# Altium PCB fpga.PcbDoc (part 5 of 6)
Units mm, origin at the board's own origin, x right, y up, seen from the top; angles counter-clockwise.
Board outline 111.63 x 111 mm, 2 copper layers (Top Layer, Bottom Layer); 5 components, 0 nets, 896 pads, 0 vias.
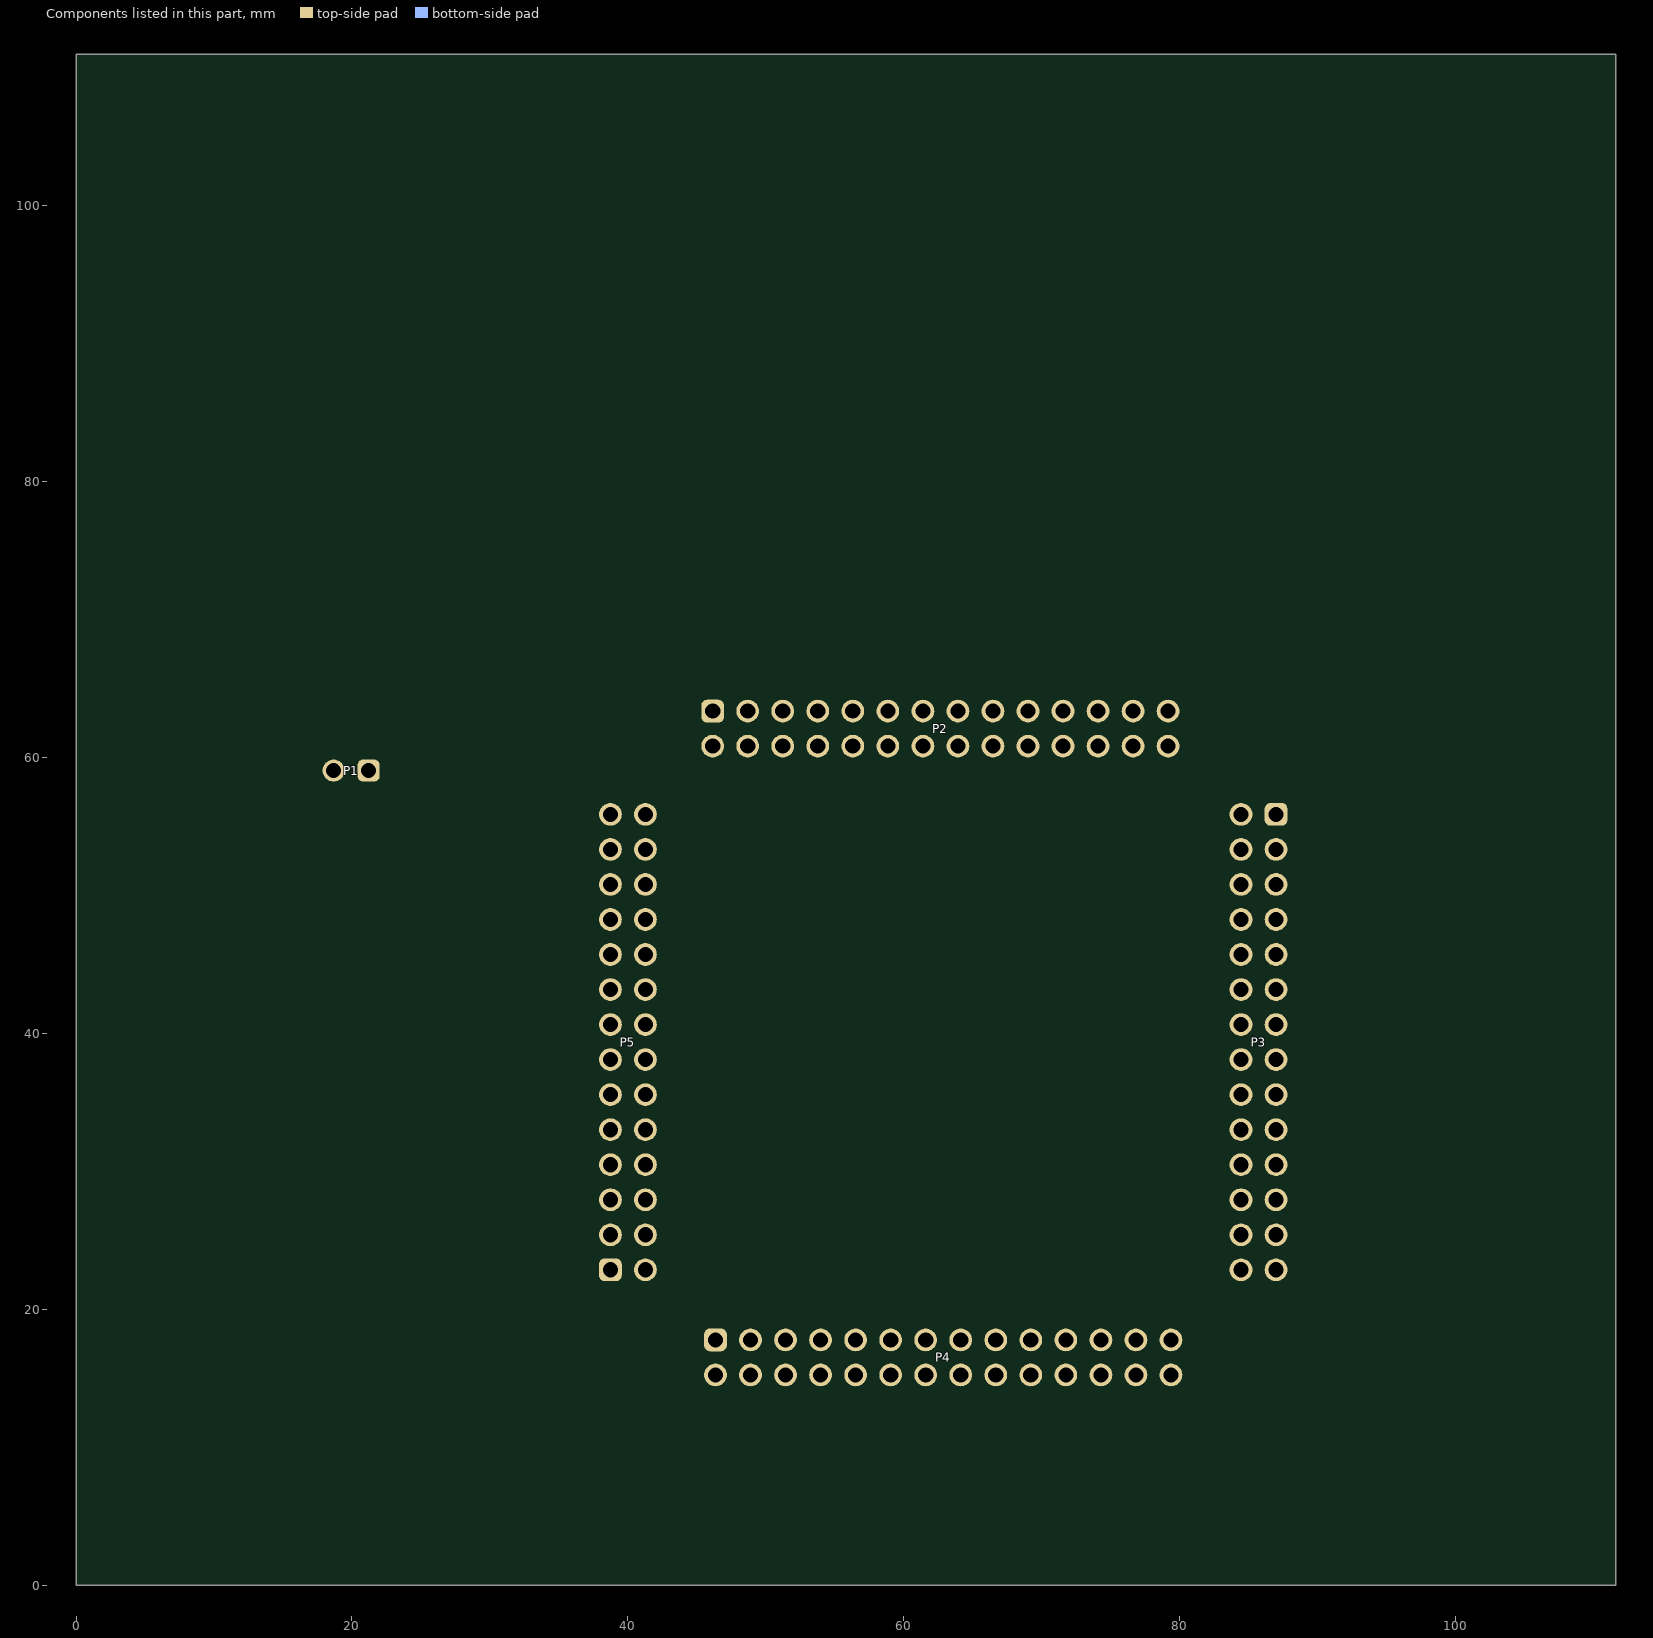
[diagram p5: the components of this part, seen from the top]

## Nets (pads, with @x,y where several pads share a name; then routed paths per layer and width w, separated by ;. In a path a pad name is that pad's centre, name@x,y a point inside that pad or via, vN(x,y) a via of type N, cw(c..) or ccw(c..) an arc to the next point about the centre after c; other vN are vias at no path point) (continued)
copper on no net: (continued)
  Top Layer w0.027: 14.522,21.97 14.672,21.97 ; 14.522,21.97 14.522,21.995 ; 14.522,21.995 14.647,21.995 ; 14.522,21.995 14.547,22.02 ; 14.522,22.045 14.647,22.045 ; 14.522,22.045 14.522,22.07 ; 14.522,22.045 14.547,22.02 ; 14.522,22.07 14.672,22.07 ; 14.522,22.07 14.547,22.095 14.522,22.12 ; 14.522,22.12 14.672,22.12 ; 14.522,22.12 14.522,22.145 ; 14.522,22.145 14.647,22.145 ; 14.522,22.145 14.547,22.17 ; 14.522,22.195 14.647,22.195 ; 14.522,22.195 14.522,22.22 ; 14.522,22.195 14.547,22.17 ; 14.522,22.22 14.672,22.22 ; 14.522,22.22 14.547,22.245 14.522,22.27 ; 14.522,22.27 14.672,22.27 ; 14.522,22.27 14.522,22.295 ; 14.522,22.295 14.647,22.295 ; 14.522,22.295 14.547,22.32 ; 14.522,22.345 14.647,22.345 ; 14.522,22.345 14.522,22.37 ; 14.522,22.345 14.547,22.32 ; 14.522,22.37 14.672,22.37 ; 14.522,22.37 14.547,22.395 14.522,22.42 ; 14.522,22.42 14.672,22.42 ; 14.522,22.42 14.522,22.445 ; 14.522,22.445 14.647,22.445 ; 14.522,22.445 14.547,22.47 ; 14.522,22.495 14.647,22.495 ; 14.522,22.495 14.522,22.52 ; 14.522,22.495 14.547,22.47 ; 14.522,22.52 14.672,22.52 ; 14.522,22.52 14.547,22.545 14.522,22.57 ; 14.522,22.57 14.672,22.57 ; 14.522,22.57 14.522,22.595 ; 14.522,22.595 14.647,22.595 ; 14.522,22.595 14.547,22.62 ; 14.522,22.645 14.647,22.645 ; 14.522,22.645 14.522,22.67 ; 14.522,22.645 14.547,22.62 ; 14.522,22.67 14.672,22.67 ; 14.522,22.67 14.547,22.695 14.522,22.72 ; 14.522,22.72 14.672,22.72 ; 14.522,22.72 14.522,22.745 ; 14.522,22.745 14.647,22.745 ; 14.522,22.745 14.547,22.77 ; 14.522,22.795 14.647,22.795 ; 14.522,22.795 14.522,22.82 ; 14.522,22.795 14.547,22.77 ; 14.522,22.82 14.672,22.82 ; 14.522,22.82 14.547,22.845 14.522,22.87 ; 14.522,22.87 14.672,22.87 ; 14.522,22.87 14.522,22.895 ; 14.522,22.895 14.647,22.895 ; 14.522,22.895 14.547,22.92 ; 14.522,22.945 14.647,22.945 ; 14.522,22.945 14.522,22.97 ; 14.522,22.945 14.547,22.92 ; 14.522,22.97 14.672,22.97 ; 14.522,22.97 14.547,22.995 14.522,23.02 ; 14.522,23.02 14.672,23.02 ; 14.522,23.02 14.522,23.045 ; 14.522,23.045 14.647,23.045 ; 14.522,23.045 14.547,23.07 ; 14.522,23.095 14.647,23.095 ; 14.522,23.095 14.522,23.12 ; 14.522,23.095 14.547,23.07 ; 14.522,23.12 14.672,23.12 ; 14.522,23.12 14.547,23.145 14.522,23.17 ; 14.522,23.17 14.672,23.17 ; 14.522,23.17 14.522,23.195 ; 14.522,23.195 14.647,23.195 ; 14.522,23.195 14.547,23.22 ; 14.522,23.245 14.647,23.245 ; 14.522,23.245 14.522,23.27 ; 14.522,23.245 14.547,23.22 ; 14.522,23.27 14.672,23.27 ; 14.522,23.27 14.547,23.295 14.522,23.32 ; 14.522,23.32 14.672,23.32 ; 14.522,23.32 14.522,23.345 ; 14.522,23.345 14.647,23.345 ; 14.522,23.345 14.547,23.37 ; 14.522,23.395 14.647,23.395 ; 14.522,23.395 14.522,23.42 ; 14.522,23.395 14.547,23.37 ; 14.522,23.42 14.672,23.42 ; 14.522,23.42 14.547,23.445 14.522,23.47 ; 14.522,23.47 14.672,23.47 ; 14.522,23.47 14.522,23.495 ; 14.522,23.495 14.647,23.495 ; 14.522,23.495 14.547,23.52 ; 14.522,23.545 14.647,23.545 ; 14.522,23.545 14.522,23.57 ; 14.522,23.545 14.547,23.52 ; 14.522,23.57 14.672,23.57 ; 14.522,23.57 14.547,23.595 14.522,23.62 ; 14.522,23.62 14.672,23.62 ; 14.522,23.62 14.522,23.645 ; 14.522,23.645 14.647,23.645 ; 14.522,23.645 14.547,23.67 ; 14.522,23.695 14.647,23.695 ; 14.522,23.695 14.522,23.72 ; 14.522,23.695 14.547,23.67 ; 14.522,23.72 14.672,23.72 ; 14.522,23.72 14.547,23.745 14.522,23.77 ; 14.522,23.77 14.672,23.77 ; 14.522,23.77 14.522,23.795 ; 14.522,23.795 14.647,23.795 ; 14.522,23.795 14.547,23.82 ; 14.522,23.845 14.647,23.845 ; 14.522,23.845 14.522,23.87 ; 14.522,23.845 14.547,23.82 ; 14.522,23.87 14.672,23.87 ; 14.522,23.87 14.547,23.895 14.522,23.92 ; 14.522,23.92 14.672,23.92 ; 14.522,23.92 14.522,23.945 ; 14.522,23.945 14.647,23.945 ; 14.522,23.945 14.547,23.97 ; 14.522,23.995 14.647,23.995 ; 14.522,23.995 14.522,24.02 ; 14.522,23.995 14.547,23.97 ; 14.522,24.02 14.672,24.02 ; 14.522,24.02 14.547,24.045 14.522,24.07 ; 14.522,24.07 14.672,24.07 ; 14.522,24.07 14.522,24.095 ; 14.522,24.095 14.647,24.095 ; 14.522,24.095 14.547,24.12 ; 14.522,24.145 14.647,24.145 ; 14.522,24.145 14.522,24.17 ; 14.522,24.145 14.547,24.12 ; 14.522,24.17 14.672,24.17 ; 14.522,24.17 14.547,24.195 14.522,24.22 ; 14.522,24.22 14.672,24.22 ; 14.522,24.22 14.522,24.245 ; 14.522,24.245 14.647,24.245 ; 14.522,24.245 14.547,24.27 ; 14.522,24.295 14.647,24.295 ; 14.522,24.295 14.522,24.32 ; 14.522,24.295 14.547,24.27 ; 14.522,24.32 14.672,24.32 ; 14.522,24.32 14.547,24.345 14.522,24.37 ; 14.522,24.37 14.672,24.37 ; 14.522,24.37 14.522,24.395 ; 14.522,24.395 14.647,24.395 ; 14.522,24.395 14.547,24.42 ; 14.522,24.445 14.647,24.445 ; 14.522,24.445 14.522,24.47 ; 14.522,24.445 14.547,24.42 ; 14.522,24.47 14.672,24.47 ; 14.522,24.47 14.547,24.495 14.522,24.52 ; 14.522,24.52 14.672,24.52 ; 14.522,24.52 14.522,24.545 ; 14.522,24.545 14.647,24.545 ; 14.522,24.545 14.547,24.57 ; 14.522,24.595 14.647,24.595 ; 14.522,24.595 14.522,24.62 ; 14.522,24.595 14.547,24.57 ; 14.522,24.62 14.672,24.62 ; 14.522,24.62 14.547,24.645 14.522,24.67 ; 14.522,24.67 14.672,24.67 ; 14.522,24.67 14.522,24.695 ; 14.522,24.695 14.647,24.695 ; 14.522,24.695 14.547,24.72 ; 14.522,24.745 14.647,24.745 ; 14.522,24.745 14.522,24.77 ; 14.522,24.745 14.547,24.72 ; 14.522,24.77 14.672,24.77 ; 14.522,24.77 14.547,24.795 14.522,24.82 ; 14.522,24.82 14.672,24.82 ; 14.522,24.82 14.522,24.845 ; 14.522,24.845 14.647,24.845 ; 14.522,24.845 14.547,24.87 ; 14.522,24.895 14.647,24.895 ; 14.522,24.895 14.522,24.92 ; 14.522,24.895 14.547,24.87 ; 14.522,24.92 14.672,24.92 ; 14.522,24.92 14.547,24.945 14.522,24.97 ; 14.522,24.97 14.672,24.97 ; 14.522,24.97 14.522,24.995 ; 14.522,24.995 14.647,24.995 ; 14.522,24.995 14.547,25.02 ; 14.522,25.045 14.647,25.045 ; 14.522,25.045 14.522,25.07 ; 14.522,25.045 14.547,25.02 ; 14.522,25.07 14.672,25.07 ; 14.522,25.07 14.547,25.095 14.522,25.12 ; 14.522,25.12 14.672,25.12 ; 14.522,25.12 14.522,25.145 ; 14.522,25.145 14.647,25.145 ; 14.522,25.145 14.547,25.17 ; 14.522,25.195 14.647,25.195 ; 14.522,25.195 14.522,25.22 ; 14.522,25.195 14.547,25.17 ; 14.522,25.22 14.672,25.22 ; 14.522,25.22 14.547,25.245 14.522,25.27 ; 14.522,25.27 14.672,25.27 ; 14.522,25.27 14.522,25.295 ; 14.522,25.295 14.647,25.295 ; 14.522,25.295 14.547,25.32 ; 14.522,25.345 14.647,25.345 ; 14.522,25.345 14.522,25.37 ; 14.522,25.345 14.547,25.32 ; 14.522,25.37 14.672,25.37 ; 14.522,25.37 14.547,25.395 14.522,25.42 ; 14.522,25.42 14.672,25.42 ; 14.522,25.42 14.522,25.445 ; 14.522,25.445 14.647,25.445 ; 14.522,25.445 14.547,25.47 ; 14.522,25.495 14.647,25.495 ; 14.522,25.495 14.522,25.52 ; 14.522,25.495 14.547,25.47 ; 14.522,25.52 14.672,25.52 ; 14.522,25.52 14.547,25.545 14.522,25.57 ; 14.522,25.57 14.672,25.57 ; 14.522,25.57 14.522,25.595 ; 14.522,25.595 14.647,25.595 ; 14.522,25.595 14.547,25.62 ; 14.522,25.645 14.647,25.645 ; 14.522,25.645 14.522,25.67 ; 14.522,25.645 14.547,25.62 ; 14.522,25.67 14.672,25.67 ; 14.522,25.67 14.547,25.695 14.522,25.72 ; 14.522,25.72 14.672,25.72 ; 14.522,25.72 14.522,25.745 ; 14.522,25.745 14.647,25.745 ; 14.522,25.745 14.547,25.77 ; 14.522,25.795 14.647,25.795 ; 14.522,25.795 14.522,25.82 ; 14.522,25.795 14.547,25.77 ; 14.522,25.82 14.672,25.82 ; 14.522,25.82 14.547,25.845 14.522,25.87 ; 14.522,25.87 14.672,25.87 ; 14.522,25.87 14.522,25.895 ; 14.522,25.895 14.647,25.895 ; 14.522,25.895 14.547,25.92 ; 14.522,25.945 14.647,25.945 ; 14.522,25.945 14.522,25.97 ; 14.522,25.945 14.547,25.92 ; 14.522,25.97 14.672,25.97 ; 14.522,25.97 14.547,25.995 14.522,26.02 ; 14.522,26.02 14.672,26.02 ; 14.522,26.02 14.522,26.045 ; 14.522,26.045 14.647,26.045 ; 14.522,26.045 14.547,26.07 ; 14.522,26.095 14.647,26.095 ; 14.522,26.095 14.522,26.12 ; 14.522,26.095 14.547,26.07 ; 14.522,26.12 14.672,26.12 ; 14.522,26.12 14.547,26.145 14.522,26.17 ; 14.522,26.17 14.672,26.17 ; 14.522,26.17 14.522,26.195 ; 14.522,26.195 14.647,26.195 ; 14.522,26.195 14.547,26.22 ; 14.522,26.245 14.647,26.245 ; 14.522,26.245 14.522,26.27 ; 14.522,26.245 14.547,26.22 ; 14.522,26.27 14.672,26.27 ; 14.522,26.27 14.547,26.295 14.522,26.32 ; 14.522,26.32 14.672,26.32 ; 14.522,26.32 14.522,26.345 ; 14.522,26.345 14.647,26.345 ; 14.522,26.345 14.547,26.37 ; 14.522,26.395 14.647,26.395 ; 14.522,26.395 14.522,26.42 ; 14.522,26.395 14.547,26.37 ; 14.522,26.42 14.672,26.42 ; 14.522,26.42 14.547,26.445 14.522,26.47 ; 14.522,26.47 14.672,26.47 ; 14.522,26.47 14.522,26.495 ; 14.522,26.495 14.647,26.495 ; 14.522,26.495 14.547,26.52 ; 14.522,26.545 14.647,26.545 ; 14.522,26.545 14.522,26.57 ; 14.522,26.545 14.547,26.52 ; 14.522,26.57 14.672,26.57 ; 14.522,26.57 14.547,26.595 14.522,26.62 ; 14.522,26.62 14.672,26.62 ; 14.522,26.62 14.522,26.645 ; 14.522,26.645 14.647,26.645 ; 14.522,26.645 14.547,26.67 ; 14.522,26.695 14.647,26.695 ; 14.522,26.695 14.522,26.72 ; 14.522,26.695 14.547,26.67 ; 14.522,26.72 14.672,26.72 ; 14.522,26.72 14.547,26.745 14.522,26.77 ; 14.522,26.77 14.672,26.77 ; 14.522,26.77 14.522,26.795 ; 14.522,26.795 14.647,26.795 ; 14.522,26.795 14.547,26.82 ; 14.522,26.845 14.647,26.845 ; 14.522,26.845 14.522,26.87 ; 14.522,26.845 14.547,26.82 ; 14.522,26.87 14.672,26.87 ; 14.522,26.87 14.547,26.895 14.522,26.92 ; 14.522,26.92 14.672,26.92 ; 14.522,26.92 14.522,26.945 ; 14.522,26.945 14.647,26.945 ; 14.522,26.945 14.547,26.97 ; 14.522,26.995 14.647,26.995 ; 14.522,26.995 14.522,27.02 ; 14.522,26.995 14.547,26.97 ; 14.522,27.02 14.672,27.02 ; 14.522,27.02 14.547,27.045 14.522,27.07 ; 14.522,27.07 14.672,27.07 ; 14.522,27.07 14.522,27.095 ; 14.522,27.095 14.647,27.095 ; 14.522,27.095 14.547,27.12 ; 14.522,27.145 14.647,27.145 ; 14.522,27.145 14.522,27.17 ; 14.522,27.145 14.547,27.12 ; 14.522,27.17 14.672,27.17 ; 14.522,27.17 14.547,27.195 14.522,27.22 ; 14.522,27.22 14.672,27.22 ; 14.522,27.22 14.522,27.245 ; 14.522,27.245 14.647,27.245 ; 14.522,27.245 14.547,27.27 ; 14.522,27.295 14.647,27.295 ; 14.522,27.295 14.522,27.32 ; 14.522,27.295 14.547,27.27 ; 14.522,27.32 14.672,27.32 ; 14.522,27.32 14.547,27.345 14.522,27.37 ; 14.522,27.37 14.672,27.37 ; 14.522,27.37 14.522,27.395 ; 14.522,27.395 14.647,27.395 ; 14.522,27.395 14.547,27.42 ; 14.522,27.445 14.647,27.445 ; 14.522,27.445 14.522,27.47 ; 14.522,27.445 14.547,27.42 ; 14.522,27.47 14.672,27.47 ; 14.522,27.47 14.547,27.495 14.522,27.52 ; 14.522,27.52 14.672,27.52 ; 14.522,27.52 14.522,27.545 ; 14.522,27.545 14.647,27.545 ; 14.522,27.545 14.547,27.57 ; 14.522,27.595 14.647,27.595 ; 14.522,27.595 14.522,27.62 ; 14.522,27.595 14.547,27.57 ; 14.522,27.62 14.672,27.62 ; 14.522,27.62 14.547,27.645 14.522,27.67 ; 14.522,27.67 14.672,27.67 ; 14.522,27.67 14.522,27.695 ; 14.522,27.695 14.647,27.695 ; 14.522,27.695 14.547,27.72 ; 14.522,27.745 14.647,27.745 ; 14.522,27.745 14.522,27.77 ; 14.522,27.745 14.547,27.72 ; 14.522,27.77 14.672,27.77 ; 14.522,27.77 14.547,27.795 14.522,27.82 ; 14.522,27.82 14.672,27.82 ; 14.522,27.82 14.522,27.845 ; 14.522,27.845 14.647,27.845 ; 14.522,27.845 14.547,27.87 ; 14.522,27.895 14.647,27.895 ; 14.522,27.895 14.522,27.92 ; 14.522,27.895 14.547,27.87 ; 14.522,27.92 14.672,27.92 ; 14.522,27.92 14.547,27.945 14.522,27.97 ; 14.522,27.97 14.672,27.97 ; 14.522,27.97 14.522,27.995 ; 14.522,27.995 14.647,27.995 ; 14.522,27.995 14.547,28.02 ; 14.522,28.045 14.647,28.045 ; 14.522,28.045 14.522,28.07 ; 14.522,28.045 14.547,28.02 ; 14.522,28.07 14.672,28.07 ; 14.522,28.07 14.547,28.095 14.522,28.12 ; 14.522,28.12 14.672,28.12 ; 14.522,28.12 14.522,28.145 ; 14.522,28.145 14.647,28.145 ; 14.522,28.145 14.547,28.17 ; 14.522,28.195 14.647,28.195 ; 14.522,28.195 14.522,28.22 ; 14.522,28.195 14.547,28.17 ; 14.522,28.22 14.672,28.22 ; 14.522,28.22 14.547,28.245 14.522,28.27 ; 14.522,28.27 14.672,28.27 ; 14.522,28.27 14.522,28.295 ; 14.522,28.295 14.647,28.295 ; 14.522,28.295 14.547,28.32 ; 14.522,28.345 14.647,28.345 ; 14.522,28.345 14.522,28.37 ; 14.522,28.345 14.547,28.32 ; 14.522,28.37 14.672,28.37 ; 14.522,28.37 14.547,28.395 14.522,28.42 ; 14.522,28.42 14.672,28.42 ; 14.522,28.42 14.522,28.445 ; 14.522,28.445 14.647,28.445 ; 14.522,28.445 14.547,28.47 ; 14.522,28.495 14.647,28.495 ; 14.522,28.495 14.522,28.52 ; 14.522,28.495 14.547,28.47 ; 14.522,28.52 14.672,28.52 ; 14.522,28.52 14.547,28.545 14.522,28.57 ; 14.522,28.57 14.672,28.57 ; 14.522,28.57 14.522,28.595 ; 14.522,28.595 14.647,28.595 ; 14.522,28.595 14.547,28.62 ; 14.522,28.645 14.647,28.645 ; 14.522,28.645 14.522,28.67 ; 14.522,28.645 14.547,28.62 ; 14.522,28.67 14.672,28.67 ; 14.522,28.67 14.547,28.695 14.522,28.72 ; 14.522,28.72 14.672,28.72 ; 14.522,28.72 14.522,28.745 ; 14.522,28.745 14.647,28.745 ; 14.522,28.745 14.547,28.77 ; 14.522,28.795 14.647,28.795 ; 14.522,28.795 14.522,28.82 ; 14.522,28.795 14.547,28.77 ; 14.522,28.82 14.672,28.82 ; 14.522,28.82 14.547,28.845 14.522,28.87 ; 14.522,28.87 14.672,28.87 ; 14.522,28.87 14.522,28.895 ; 14.522,28.895 14.647,28.895 ; 14.522,28.895 14.547,28.92 ; 14.522,28.945 14.647,28.945 ; 14.522,28.945 14.522,28.97 ; 14.522,28.945 14.547,28.92 ; 14.522,28.97 14.672,28.97 ; 14.522,28.97 14.547,28.995 14.522,29.02 ; 14.522,29.02 14.672,29.02 ; 14.522,29.02 14.522,29.045 ; 14.522,29.045 14.647,29.045 ; 14.522,29.045 14.547,29.07 ; 14.522,29.095 14.647,29.095 ; 14.522,29.095 14.522,29.12 ; 14.522,29.095 14.547,29.07 ; 14.522,29.12 14.672,29.12 ; 14.522,29.12 14.547,29.145 14.522,29.17 ; 14.522,29.17 14.672,29.17 ; 14.522,29.17 14.522,29.195 ; 14.522,29.195 14.647,29.195 ; 14.522,29.195 14.547,29.22 ; 14.522,29.245 14.647,29.245 ; 14.522,29.245 14.522,29.27 ; 14.522,29.245 14.547,29.22 ; 14.522,29.27 14.672,29.27 ; 14.522,29.27 14.547,29.295 14.522,29.32 ; 14.522,29.32 14.672,29.32 ; 14.522,29.32 14.522,29.345 ; 14.522,29.345 14.647,29.345 ; 14.522,29.345 14.547,29.37 ; 14.522,29.395 14.647,29.395 ; 14.522,29.395 14.522,29.42 ; 14.522,29.395 14.547,29.37 ; 14.522,29.42 14.672,29.42 ; 14.522,29.42 14.547,29.445 14.522,29.47 ; 14.522,29.47 14.672,29.47 ; 14.522,29.47 14.522,29.495 ; 14.522,29.495 14.647,29.495 ; 14.522,29.495 14.547,29.52 ; 14.522,29.545 14.647,29.545 ; 14.522,29.545 14.522,29.57 ; 14.522,29.545 14.547,29.52 ; 14.522,29.57 14.672,29.57 ; 14.522,29.57 14.547,29.595 14.522,29.62 ; 14.522,29.62 14.672,29.62 ; 14.522,29.62 14.522,29.645 ; 14.522,29.645 14.647,29.645 ; 14.522,29.645 14.547,29.67 ; 14.522,29.695 14.647,29.695 ; 14.522,29.695 14.522,29.72 ; 14.522,29.695 14.547,29.67 ; 14.522,29.72 14.672,29.72 ; 14.522,29.72 14.547,29.745 14.522,29.77 ; 14.522,29.77 14.672,29.77 ; 14.522,29.77 14.522,29.795 ; 14.522,29.795 14.647,29.795 ; 14.522,29.795 14.547,29.82 ; 14.522,29.845 14.647,29.845 ; 14.522,29.845 14.522,29.87 ; 14.522,29.845 14.547,29.82 ; 14.522,29.87 14.672,29.87 ; 14.522,29.87 14.547,29.895 14.522,29.92 ; 14.522,29.92 14.672,29.92 ; 14.522,29.92 14.522,29.945 ; 14.522,29.945 14.647,29.945 ; 14.522,29.945 14.547,29.97 ; 14.522,29.995 14.647,29.995 ; 14.522,29.995 14.522,30.02 ; 14.522,29.995 14.547,29.97 ; 14.522,30.02 14.672,30.02 ; 14.522,30.02 14.547,30.045 14.522,30.07 ; 14.522,30.07 14.672,30.07 ; 14.522,30.07 14.522,30.095 ; 14.522,30.095 14.647,30.095 ; 14.522,30.095 14.547,30.12 ; 14.522,30.145 14.647,30.145 ; 14.522,30.145 14.522,30.17 ; 14.522,30.145 14.547,30.12 ; 14.522,30.17 14.672,30.17 ; 14.522,30.17 14.547,30.195 14.522,30.22 ; 14.522,30.22 14.672,30.22 ; 14.522,30.22 14.522,30.245 ; 14.522,30.245 14.647,30.245 ; 14.522,30.245 14.547,30.27 ; 14.522,30.295 14.647,30.295 ; 14.522,30.295 14.522,30.32 ; 14.522,30.295 14.547,30.27 ; 14.522,30.32 14.672,30.32 ; 14.522,30.32 14.547,30.345 14.522,30.37 ; 14.522,30.37 14.672,30.37 ; 14.522,30.37 14.522,30.395 ; 14.522,30.395 14.647,30.395 ; 14.522,30.395 14.547,30.42 ; 14.522,30.445 14.647,30.445 ; 14.522,30.445 14.522,30.47 ; 14.522,30.445 14.547,30.42 ; 14.522,30.47 14.672,30.47 ; 14.522,30.47 14.547,30.495 14.522,30.52 ; 14.522,30.52 14.672,30.52 ; 14.522,30.52 14.522,30.545 ; 14.522,30.545 14.647,30.545 ; 14.522,30.545 14.547,30.57 ; 14.522,30.595 14.647,30.595 ; 14.522,30.595 14.522,30.62 ; 14.522,30.595 14.547,30.57 ; 14.522,30.62 14.672,30.62 ; 14.522,30.62 14.547,30.645 14.522,30.67 ; 14.522,30.67 14.672,30.67 ; 14.522,30.67 14.522,30.695 ; 14.522,30.695 14.647,30.695 ; 14.522,30.695 14.547,30.72 ; 14.522,30.745 14.647,30.745 ; 14.522,30.745 14.522,30.77 ; 14.522,30.745 14.547,30.72 ; 14.522,30.77 14.672,30.77 ; 14.522,30.77 14.547,30.795 14.522,30.82 ; 14.522,30.82 14.672,30.82 ; 14.522,30.82 14.522,30.845 ; 14.522,30.845 14.647,30.845 ; 14.522,30.845 14.547,30.87 ; 14.522,30.895 14.647,30.895 ; 14.522,30.895 14.522,30.92 ; 14.522,30.895 14.547,30.87 ; 14.522,30.92 14.672,30.92 ; 14.522,30.92 14.547,30.945 14.522,30.97 ; 14.522,30.97 14.672,30.97 ; 14.522,30.97 14.522,30.995 ; 14.522,30.995 14.647,30.995 ; 14.522,30.995 14.547,31.02 ; 14.522,31.045 14.647,31.045 ; 14.522,31.045 14.522,31.07 ; 14.522,31.045 14.547,31.02 ; 14.522,31.07 14.672,31.07 ; 14.522,31.07 14.547,31.095 14.522,31.12 ; 14.522,31.12 14.672,31.12 ; 14.522,31.12 14.522,31.145 ; 14.522,31.145 14.647,31.145 ; 14.522,31.145 14.547,31.17 ; 14.522,31.195 14.647,31.195 ; 14.522,31.195 14.522,31.22 ; 14.522,31.195 14.547,31.17 ; 14.522,31.22 14.672,31.22 ; 14.522,31.22 14.547,31.245 14.522,31.27 ; 14.522,31.27 14.672,31.27 ; 14.522,31.27 14.522,31.295 ; 14.522,31.295 14.647,31.295 ; 14.522,31.295 14.547,31.32 ; 14.522,31.345 14.647,31.345 ; 14.522,31.345 14.522,31.37 ; 14.522,31.345 14.547,31.32 ; 14.522,31.37 14.672,31.37 ; 14.522,31.37 14.547,31.395 14.522,31.42 ; 14.522,31.42 14.672,31.42 ; 14.522,31.42 14.522,31.445 ; 14.522,31.445 14.647,31.445 ; 14.522,31.445 14.547,31.47 ; 14.522,31.495 14.647,31.495 ; 14.522,31.495 14.522,31.52 ; 14.522,31.495 14.547,31.47 ; 14.522,31.52 14.672,31.52 ; 14.522,31.52 14.547,31.545 14.522,31.57 ; 14.522,31.57 14.672,31.57 ; 14.522,31.57 14.522,31.595 ; 14.522,31.595 14.647,31.595 ; 14.522,31.595 14.547,31.62 ; 14.522,31.645 14.647,31.645 ; 14.522,31.645 14.522,31.67 ; 14.522,31.645 14.547,31.62 ; 14.522,31.67 14.672,31.67 ; 14.522,31.67 14.547,31.695 14.522,31.72 ; 14.522,31.72 14.672,31.72 ; 14.522,31.72 14.522,31.745 ; 14.522,31.745 14.647,31.745 ; 14.522,31.745 14.547,31.77 ; 14.522,31.795 14.647,31.795 ; 14.522,31.795 14.522,31.82 ; 14.522,31.795 14.547,31.77 ; 14.522,31.82 14.672,31.82 ; 14.522,31.82 14.547,31.845 14.522,31.87 ; 14.522,31.87 14.672,31.87 ; 14.522,31.87 14.522,31.895 ; 14.522,31.895 14.647,31.895 ; 14.522,31.895 14.547,31.92 ; 14.522,31.945 14.647,31.945 ; 14.522,31.945 14.522,31.97 ; 14.522,31.945 14.547,31.92 ; 14.522,31.97 14.672,31.97 ; 14.522,31.97 14.547,31.995 14.522,32.02 ; 14.522,32.02 14.672,32.02 ; 14.522,32.02 14.522,32.045 ; 14.522,32.045 14.647,32.045 ; 14.522,32.045 14.547,32.07 ; 14.522,32.095 14.647,32.095 ; 14.522,32.095 14.522,32.12 ; 14.522,32.095 14.547,32.07 ; 14.522,32.12 14.672,32.12 ; 14.522,32.12 14.547,32.145 14.522,32.17 ; 14.522,32.17 14.672,32.17 ; 14.522,32.17 14.522,32.195 ; 14.522,32.195 14.647,32.195 ; 14.522,32.195 14.547,32.22 ; 14.522,32.245 14.647,32.245 ; 14.522,32.245 14.522,32.27 ; 14.522,32.245 14.547,32.22 ; 14.522,32.27 14.672,32.27 ; 14.522,32.27 14.547,32.295 14.522,32.32 ; 14.522,32.32 14.672,32.32 ; 14.522,32.32 14.522,32.345 ; 14.522,32.345 14.647,32.345 ; 14.522,32.345 14.547,32.37 ; 14.522,32.395 14.647,32.395 ; 14.522,32.395 14.522,32.42 ; 14.522,32.395 14.547,32.37 ; 14.522,32.42 14.672,32.42 ; 14.522,32.42 14.547,32.445 14.522,32.47 ; 14.522,32.47 14.672,32.47 ; 14.522,32.47 14.522,32.495 ; 14.522,32.495 14.647,32.495 ; 14.522,32.495 14.547,32.52 ; 14.522,32.545 14.647,32.545 ; 14.522,32.545 14.522,32.57 ; 14.522,32.545 14.547,32.52 ; 14.522,32.57 14.672,32.57 ; 14.522,32.57 14.547,32.595 14.522,32.62 ; 14.522,32.62 14.672,32.62 ; 14.522,32.62 14.522,32.645 ; 14.522,32.645 14.647,32.645 ; 14.522,32.645 14.547,32.67 ; 14.522,32.695 14.647,32.695 ; 14.522,32.695 14.522,32.72 ; 14.522,32.695 14.547,32.67 ; 14.522,32.72 14.672,32.72 ; 14.522,32.72 14.547,32.745 14.522,32.77 ; 14.522,32.77 14.672,32.77 ; 14.522,32.77 14.522,32.795 ; 14.522,32.795 14.647,32.795 ; 14.522,32.795 14.547,32.82 ; 14.522,32.845 14.647,32.845 ; 14.522,32.845 14.522,32.87 ; 14.522,32.845 14.547,32.82 ; 14.522,32.87 14.672,32.87 ; 14.522,32.87 14.547,32.895 14.522,32.92 ; 14.522,32.92 14.672,32.92 ; 14.522,32.92 14.522,32.945 ; 14.522,32.945 14.647,32.945 ; 14.522,32.945 14.547,32.97 ; 14.522,32.995 14.647,32.995 ; 14.522,32.995 14.522,33.02 ; 14.522,32.995 14.547,32.97 ; 14.522,33.02 14.672,33.02 ; 14.522,33.02 14.547,33.045 14.522,33.07 ; 14.522,33.07 14.672,33.07 ; 14.522,33.07 14.522,33.095 ; 14.522,33.095 14.647,33.095 ; 14.522,33.095 14.547,33.12 ; 14.522,33.145 14.647,33.145 ; 14.522,33.145 14.522,33.17 ; 14.522,33.145 14.547,33.12 ; 14.522,33.17 14.672,33.17 ; 14.522,33.17 14.547,33.195 14.522,33.22 ; 14.522,33.22 14.672,33.22 ; 14.522,33.22 14.522,33.245 ; 14.522,33.245 14.647,33.245 ; 14.522,33.245 14.547,33.27 ; 14.522,33.295 14.647,33.295 ; 14.522,33.295 14.522,33.32 ; 14.522,33.295 14.547,33.27 ; 14.522,33.32 14.672,33.32 ; 14.522,33.32 14.547,33.345 14.522,33.37 ; 14.522,33.37 14.672,33.37 ; 14.522,33.37 14.522,33.395 ; 14.522,33.395 14.647,33.395 ; 14.522,33.395 14.547,33.42 ; 14.522,33.445 14.647,33.445 ; 14.522,33.445 14.522,33.47 ; 14.522,33.445 14.547,33.42 ; 14.522,33.47 14.672,33.47 ; 14.522,33.47 14.547,33.495 14.522,33.52 ; 14.522,33.52 14.672,33.52 ; 14.522,33.52 14.522,33.545 ; 14.522,33.545 14.647,33.545 ; 14.522,33.545 14.547,33.57 ; 14.522,33.595 14.647,33.595 ; 14.522,33.595 14.522,33.62 ; 14.522,33.595 14.547,33.57 ; 14.522,33.62 14.672,33.62 ; 14.522,33.62 14.547,33.645 14.522,33.67 ; 14.522,33.67 14.672,33.67 ; 14.522,33.67 14.522,33.695 ; 14.522,33.695 14.647,33.695 ; 14.522,33.695 14.547,33.72 ; 14.522,33.745 14.647,33.745 ; 14.522,33.745 14.522,33.77 ; 14.522,33.745 14.547,33.72 ; 14.522,33.77 14.672,33.77 ; 14.522,33.77 14.547,33.795 14.522,33.82 ; 14.522,33.82 14.672,33.82 ; 14.522,33.82 14.522,33.845 ; 14.522,33.845 14.647,33.845 ; 14.522,33.845 14.547,33.87 ; 14.522,33.895 14.647,33.895 ; 14.522,33.895 14.522,33.92 ; 14.522,33.895 14.547,33.87 ; 14.522,33.92 14.672,33.92 ; 14.522,33.92 14.547,33.945 14.522,33.97 ; 14.522,33.97 14.672,33.97 ; 14.522,33.97 14.522,33.995 ; 14.522,33.995 14.647,33.995 ; 14.522,33.995 14.547,34.02 ; 14.522,34.045 14.647,34.045 ; 14.522,34.045 14.522,34.07 ; 14.522,34.045 14.547,34.02 ; 14.522,34.07 14.672,34.07 ; 14.522,34.07 14.547,34.095 14.522,34.12 ; 14.522,34.12 14.672,34.12 ; 14.522,34.12 14.522,34.145 ; 14.522,34.145 14.647,34.145 ; 14.522,34.145 14.547,34.17 ; 14.522,34.195 14.647,34.195 ; 14.522,34.195 14.522,34.22 ; 14.522,34.195 14.547,34.17 ; 14.522,34.22 14.672,34.22 ; 14.522,34.22 14.547,34.245 14.522,34.27 ; 14.522,34.27 14.672,34.27 ; 14.522,34.27 14.522,34.295 ; 14.522,34.295 14.647,34.295 ; 14.522,34.295 14.547,34.32 ; 14.522,34.345 14.647,34.345 ; 14.522,34.345 14.522,34.37 ; 14.522,34.345 14.547,34.32 ; 14.522,34.37 14.672,34.37 ; 14.522,34.37 14.547,34.395 14.522,34.42 ; 14.522,34.42 14.672,34.42 ; 14.522,34.42 14.522,34.445 ; 14.522,34.445 14.647,34.445 ; 14.522,34.445 14.547,34.47 ; 14.522,34.495 14.647,34.495 ; 14.522,34.495 14.522,34.52 ; 14.522,34.495 14.547,34.47 ; 14.522,34.52 14.672,34.52 ; 14.522,34.52 14.547,34.545 14.522,34.57 ; 14.522,34.57 14.672,34.57 ; 14.522,34.57 14.522,34.595 ; 14.522,34.595 14.647,34.595 ; 14.522,34.595 14.547,34.62 ; 14.522,34.645 14.647,34.645 ; 14.522,34.645 14.522,34.67 ; 14.522,34.645 14.547,34.62 ; 14.522,34.67 14.672,34.67 ; 14.522,34.67 14.547,34.695 14.522,34.72 ; 14.522,34.72 14.672,34.72 ; 14.522,34.72 14.522,34.745 ; 14.522,34.745 14.647,34.745 ; 14.522,34.745 14.547,34.77 ; 14.522,34.795 14.647,34.795 ; 14.522,34.795 14.522,34.82 ; 14.522,34.795 14.547,34.77 ; 14.522,34.82 14.672,34.82 ; 14.522,34.82 14.547,34.845 14.522,34.87 ; 14.522,34.87 14.672,34.87 ; 14.522,34.87 14.522,34.895 ; 14.522,34.895 14.647,34.895 ; 14.522,34.895 14.547,34.92 ; 14.522,34.945 14.647,34.945 ; 14.522,34.945 14.522,34.97 ; 14.522,34.945 14.547,34.92 ; 14.522,34.97 14.672,34.97 ; 14.522,34.97 14.547,34.995 14.522,35.02 ; 14.522,35.02 14.672,35.02 ; 14.522,35.02 14.522,35.045 ; 14.522,35.045 14.647,35.045 ; 14.522,35.045 14.547,35.07 ; 14.522,35.095 14.647,35.095 ; 14.522,35.095 14.522,35.12 ; 14.522,35.095 14.547,35.07 ; 14.522,35.12 14.672,35.12 ; 14.522,35.12 14.547,35.145 14.522,35.17 ; 14.522,35.17 14.672,35.17 ; 14.522,35.17 14.522,35.195 ; 14.522,35.195 14.647,35.195 ; 14.522,35.195 14.547,35.22 ; 14.522,35.245 14.647,35.245 ; 14.522,35.245 14.522,35.27 ; 14.522,35.245 14.547,35.22 ; 14.522,35.27 14.672,35.27 ; 14.522,35.27 14.547,35.295 14.522,35.32 ; 14.522,35.32 14.672,35.32 ; 14.522,35.32 14.522,35.345 ; 14.522,35.345 14.647,35.345 ; 14.522,35.345 14.547,35.37 ; 14.522,35.395 14.647,35.395 ; 14.522,35.395 14.522,35.42 ; 14.522,35.395 14.547,35.37 ; 14.522,35.42 14.672,35.42 ; 14.522,35.42 14.547,35.445 14.522,35.47 ; 14.522,35.47 14.672,35.47 ; 14.522,35.47 14.522,35.495 ; 14.522,35.495 14.647,35.495 ; 14.522,35.495 14.547,35.52 ; 14.522,35.545 14.647,35.545 ; 14.522,35.545 14.522,35.57 ; 14.522,35.545 14.547,35.52 ; 14.522,35.57 14.672,35.57 ; 14.522,35.57 14.547,35.595 14.522,35.62 ; 14.522,35.62 14.672,35.62 ; 14.522,35.62 14.522,35.645 ; 14.522,35.645 14.647,35.645 ; 14.522,35.645 14.547,35.67 ; 14.522,35.695 14.647,35.695 ; 14.522,35.695 14.522,35.72 ; 14.522,35.695 14.547,35.67 ; 14.522,35.72 14.672,35.72 ; 14.522,35.72 14.547,35.745 14.522,35.77 ; 14.522,35.77 14.672,35.77 ; 14.522,35.77 14.522,35.795 ; 14.522,35.795 14.647,35.795 ; 14.522,35.795 14.547,35.82 ; 14.522,35.845 14.647,35.845 ; 14.522,35.845 14.522,35.87 ; 14.522,35.845 14.547,35.82 ; 14.522,35.87 14.672,35.87 ; 14.522,35.87 14.547,35.895 14.522,35.92 ; 14.522,35.92 14.672,35.92 ; 14.522,35.92 14.522,35.945 ; 14.522,35.945 14.647,35.945 ; 14.522,35.945 14.547,35.97 ; 14.522,35.995 14.647,35.995 ; 14.522,35.995 14.522,36.02 ; 14.522,35.995 14.547,35.97 ; 14.522,36.02 14.672,36.02 ; 14.522,36.02 14.547,36.045 14.522,36.07 ; 14.522,36.07 14.672,36.07 ; 14.522,36.07 14.522,36.095 ; 14.522,36.095 14.647,36.095 ; 14.522,36.095 14.547,36.12 ; 14.522,36.145 14.647,36.145 ; 14.522,36.145 14.522,36.17 ; 14.522,36.145 14.547,36.12 ; 14.522,36.17 14.672,36.17 ; 14.522,36.17 14.547,36.195 14.522,36.22 ; 14.522,36.22 14.672,36.22 ; 14.522,36.22 14.522,36.245 ; 14.522,36.245 14.647,36.245 ; 14.522,36.245 14.547,36.27 ; 14.522,36.295 14.647,36.295 ; 14.522,36.295 14.522,36.32 ; 14.522,36.295 14.547,36.27 ; 14.522,36.32 14.672,36.32 ; 14.522,36.32 14.547,36.345 14.522,36.37 ; 14.522,36.37 14.672,36.37 ; 14.522,36.37 14.522,36.395 ; 14.522,36.395 14.647,36.395 ; 14.522,36.395 14.547,36.42 ; 14.522,36.445 14.647,36.445 ; 14.522,36.445 14.522,36.47 ; 14.522,36.445 14.547,36.42 ; 14.522,36.47 14.672,36.47 ; 14.522,36.47 14.547,36.495 14.522,36.52 ; 14.522,36.52 14.672,36.52 ; 14.522,36.52 14.522,36.545 ; 14.522,36.545 14.647,36.545 ; 14.522,36.545 14.547,36.57 ; 14.522,36.595 14.647,36.595 ; 14.522,36.595 14.522,36.62 ; 14.522,36.595 14.547,36.57 ; 14.522,36.62 14.672,36.62 ; 14.522,36.62 14.547,36.645 14.522,36.67 ; 14.522,36.67 14.672,36.67 ; 14.522,36.67 14.522,36.695 ; 14.522,36.695 14.647,36.695 ; 14.522,36.695 14.547,36.72 ; 14.522,36.745 14.647,36.745 ; 14.522,36.745 14.522,36.77 ; 14.522,36.745 14.547,36.72 ; 14.522,36.77 14.672,36.77 ; 14.522,36.77 14.547,36.795 14.522,36.82 ; 14.522,36.82 14.672,36.82 ; 14.522,36.82 14.522,36.845 ; 14.522,36.845 14.647,36.845 ; 14.522,36.845 14.547,36.87 ; 14.522,36.895 14.647,36.895 ; 14.522,36.895 14.522,36.92 ; 14.522,36.895 14.547,36.87 ; 14.522,36.92 14.672,36.92 ; 14.522,36.92 14.547,36.945 14.522,36.97 ; 14.522,36.97 14.672,36.97 ; 14.522,36.97 14.522,36.995 ; 14.522,36.995 14.647,36.995 ; 14.522,36.995 14.547,37.02 ; 14.522,37.045 14.647,37.045 ; 14.522,37.045 14.522,37.07 ; 14.522,37.045 14.547,37.02 ; 14.522,37.07 14.672,37.07 ; 14.522,37.07 14.547,37.095 14.522,37.12 ; 14.522,37.12 14.672,37.12 ; 14.522,37.12 14.522,37.145 ; 14.522,37.145 14.647,37.145 ; 14.522,37.145 14.547,37.17 ; 14.522,37.195 14.647,37.195 ; 14.522,37.195 14.522,37.22 ; 14.522,37.195 14.547,37.17 ; 14.522,37.22 14.672,37.22 ; 14.522,37.22 14.547,37.245 14.522,37.27 ; 14.522,37.27 14.672,37.27 ; 14.522,37.27 14.522,37.295 ; 14.522,37.295 14.647,37.295 ; 14.522,37.295 14.547,37.32 ; 14.522,37.345 14.647,37.345 ; 14.522,37.345 14.522,37.37 ; 14.522,37.345 14.547,37.32 ; 14.522,37.37 14.672,37.37 ; 14.522,37.37 14.547,37.395 14.522,37.42 ; 14.522,37.42 14.672,37.42 ; 14.522,37.42 14.522,37.445 ; 14.522,37.445 14.647,37.445 ; 14.522,37.445 14.547,37.47 ; 14.522,37.495 14.647,37.495 ; 14.522,37.495 14.522,37.52 ; 14.522,37.495 14.547,37.47 ; 14.522,37.52 14.672,37.52 ; 14.522,37.52 14.547,37.545 14.522,37.57 ; 14.522,37.57 14.672,37.57 ; 14.522,37.57 14.522,37.595 ; 14.522,37.595 14.647,37.595 ; 14.522,37.595 14.547,37.62 ; 14.522,37.645 14.647,37.645 ; 14.522,37.645 14.522,37.67 ; 14.522,37.645 14.547,37.62 ; 14.522,37.67 14.672,37.67 ; 14.522,37.67 14.547,37.695 14.522,37.72 ; 14.522,37.72 14.672,37.72 ; 14.522,37.72 14.522,37.745 ; 14.522,37.745 14.647,37.745 ; 14.522,37.745 14.547,37.77 ; 14.522,37.795 14.647,37.795 ; 14.522,37.795 14.522,37.82 ; 14.522,37.795 14.547,37.77 ; 14.522,37.82 14.672,37.82 ; 14.522,37.82 14.547,37.845 14.522,37.87 ; 14.522,37.87 14.672,37.87 ; 14.522,37.87 14.522,37.895 ; 14.522,37.895 14.647,37.895 ; 14.522,37.895 14.547,37.92 ; 14.522,37.945 14.647,37.945 ; 14.522,37.945 14.522,37.97 ; 14.522,37.945 14.547,37.92 ; 14.522,37.97 14.672,37.97 ; 14.522,37.97 14.547,37.995 14.522,38.02 ; 14.522,38.02 14.672,38.02 ; 14.522,38.02 14.522,38.045 ; 14.522,38.045 14.647,38.045 ; 14.522,38.045 14.547,38.07 ; 14.522,38.095 14.647,38.095 ; 14.522,38.095 14.522,38.12 ; 14.522,38.095 14.547,38.07 ; 14.522,38.12 14.672,38.12 ; 14.522,38.12 14.547,38.145 14.522,38.17 ; 14.522,38.17 14.672,38.17 ; 14.522,38.17 14.522,38.195 ; 14.522,38.195 14.647,38.195 ; 14.522,38.195 14.547,38.22 ; 14.522,38.245 14.647,38.245 ; 14.522,38.245 14.522,38.27 ; 14.522,38.245 14.547,38.22 ; 14.522,38.27 14.672,38.27 ; 14.522,38.27 14.547,38.295 14.522,38.32 ; 14.522,38.32 14.672,38.32 ; 14.522,38.32 14.522,38.345 ; 14.522,38.345 14.647,38.345 ; 14.522,38.345 14.547,38.37 ; 14.522,38.395 14.647,38.395 ; 14.522,38.395 14.522,38.42 ; 14.522,38.395 14.547,38.37 ; 14.522,38.42 14.672,38.42 ; 14.522,38.42 14.547,38.445 14.522,38.47 ; 14.522,38.47 14.672,38.47 ; 14.522,38.47 14.522,38.495 ; 14.522,38.495 14.647,38.495 ; 14.522,38.495 14.547,38.52 ; 14.522,38.545 14.647,38.545 ; 14.522,38.545 14.522,38.57 ; 14.522,38.545 14.547,38.52 ; 14.522,38.57 14.672,38.57 ; 14.522,38.57 14.547,38.595 14.522,38.62 ; 14.522,38.62 14.672,38.62 ; 14.522,38.62 14.522,38.645 ; 14.522,38.645 14.647,38.645 ; 14.522,38.645 14.547,38.67 ; 14.522,38.695 14.647,38.695 ; 14.522,38.695 14.522,38.72 ; 14.522,38.695 14.547,38.67 ; 14.522,38.72 14.672,38.72 ; 14.522,38.72 14.547,38.745 14.522,38.77 ; 14.522,38.77 14.672,38.77 ; 14.522,38.77 14.522,38.795 ; 14.522,38.795 14.647,38.795 ; 14.522,38.795 14.547,38.82 ; 14.522,38.845 14.647,38.845 ; 14.522,38.845 14.522,38.87 ; 14.522,38.845 14.547,38.82 ; 14.522,38.87 14.672,38.87 ; 14.522,38.87 14.547,38.895 14.522,38.92 ; 14.522,38.92 14.672,38.92 ; 14.522,38.92 14.522,38.945 ; 14.522,38.945 14.647,38.945 ; 14.522,38.945 14.547,38.97 ; 14.522,38.995 14.647,38.995 ; 14.522,38.995 14.522,39.02 ; 14.522,38.995 14.547,38.97 ; 14.522,39.02 14.672,39.02 ; 14.522,39.02 14.547,39.045 14.522,39.07 ; 14.522,39.07 14.672,39.07 ; 14.522,39.07 14.522,39.095 ; 14.522,39.095 14.647,39.095 ; 14.522,39.095 14.547,39.12 ; 14.522,39.145 14.647,39.145 ; 14.522,39.145 14.522,39.17 ; 14.522,39.145 14.547,39.12 ; 14.522,39.17 14.672,39.17 ; 14.522,39.17 14.547,39.195 14.522,39.22 ; 14.522,39.22 14.672,39.22 ; 14.522,39.22 14.522,39.245 ; 14.522,39.245 14.647,39.245 ; 14.522,39.245 14.547,39.27 ; 14.522,39.295 14.647,39.295 ; 14.522,39.295 14.522,39.32 ; 14.522,39.295 14.547,39.27 ; 14.522,39.32 14.672,39.32 ; 14.522,39.32 14.547,39.345 14.522,39.37 ; 14.522,39.37 14.672,39.37 ; 14.522,39.37 14.522,39.395 ; 14.522,39.395 14.647,39.395 ; 14.522,39.395 14.547,39.42 ; 14.522,39.445 14.647,39.445 ; 14.522,39.445 14.522,39.47 ; 14.522,39.445 14.547,39.42 ; 14.522,39.47 14.672,39.47 ; 14.522,39.47 14.547,39.495 14.522,39.52 ; 14.522,39.52 14.672,39.52 ; 14.522,39.52 14.522,39.545 ; 14.522,39.545 14.647,39.545 ; 14.522,39.545 14.547,39.57 ; 14.522,39.595 14.647,39.595 ; 14.522,39.595 14.522,39.62 ; 14.522,39.595 14.547,39.57 ; 14.522,39.62 14.672,39.62 ; 14.522,39.62 14.547,39.645 14.522,39.67 ; 14.522,39.67 14.672,39.67 ; 14.522,39.67 14.522,39.695 ; 14.522,39.695 14.647,39.695 ; 14.522,39.695 14.547,39.72 ; 14.522,39.745 14.647,39.745 ; 14.522,39.745 14.522,39.77 ; 14.522,39.745 14.547,39.72 ; 14.522,39.77 14.672,39.77 ; 14.522,39.77 14.547,39.795 14.522,39.82 ; 14.522,39.82 14.672,39.82 ; 14.522,39.82 14.522,39.845 ; 14.522,39.845 14.647,39.845 ; 14.522,39.845 14.547,39.87 ; 14.522,39.895 14.647,39.895 ; 14.522,39.895 14.522,39.92 ; 14.522,39.895 14.547,39.87 ; 14.522,39.92 14.672,39.92 ; 14.522,39.92 14.547,39.945 14.522,39.97 ; 14.522,39.97 14.672,39.97 ; 14.522,39.97 14.522,39.995 ; 14.522,39.995 14.647,39.995 ; 14.522,39.995 14.547,40.02 ; 14.522,40.045 14.647,40.045 ; 14.522,40.045 14.522,40.07 ; 14.522,40.045 14.547,40.02 ; 14.522,40.07 14.672,40.07 ; 14.522,40.07 14.547,40.095 14.522,40.12 ; 14.522,40.12 14.672,40.12 ; 14.522,40.12 14.522,40.145 ; 14.522,40.145 14.647,40.145 ; 14.522,40.145 14.547,40.17 ; 14.522,40.195 14.647,40.195 ; 14.522,40.195 14.522,40.22 ; 14.522,40.195 14.547,40.17 ; 14.522,40.22 14.672,40.22 ; 14.522,40.22 14.547,40.245 14.522,40.27 ; 14.522,40.27 14.672,40.27 ; 14.522,40.27 14.522,40.295 ; 14.522,40.295 14.647,40.295 ; 14.522,40.295 14.547,40.32 ; 14.522,40.345 14.647,40.345 ; 14.522,40.345 14.522,40.37 ; 14.522,40.345 14.547,40.32 ; 14.522,40.37 14.672,40.37 ; 14.522,40.37 14.547,40.395 14.522,40.42 ; 14.522,40.42 14.672,40.42 ; 14.522,40.42 14.522,40.445 ; 14.522,40.445 14.647,40.445 ; 14.522,40.445 14.547,40.47 ; 14.522,40.495 14.647,40.495 ; 14.522,40.495 14.522,40.52 ; 14.522,40.495 14.547,40.47 ; 14.522,40.52 14.672,40.52 ; 14.522,40.52 14.547,40.545 14.522,40.57 ; 14.522,40.57 14.672,40.57 ; 14.522,40.57 14.522,40.595 ; 14.522,40.595 14.647,40.595 ; 14.522,40.595 14.547,40.62 ; 14.522,40.645 14.647,40.645 ; 14.522,40.645 14.522,40.67 ; 14.522,40.645 14.547,40.62 ; 14.522,40.67 14.672,40.67 ; 14.522,40.67 14.547,40.695 14.522,40.72 ; 14.522,40.72 14.672,40.72 ; 14.522,40.72 14.522,40.745 ; 14.522,40.745 14.647,40.745 ; 14.522,40.745 14.547,40.77 ; 14.522,40.795 14.647,40.795 ; 14.522,40.795 14.522,40.82 ; 14.522,40.795 14.547,40.77 ; 14.522,40.82 14.672,40.82 ; 14.522,40.82 14.547,40.845 14.522,40.87 ; 14.522,40.87 14.672,40.87 ; 14.522,40.87 14.522,40.895 ; 14.522,40.895 14.647,40.895 ; 14.522,40.895 14.547,40.92 ; 14.522,40.945 14.647,40.945 ; 14.522,40.945 14.522,40.97 ; 14.522,40.945 14.547,40.92 ; 14.522,40.97 14.672,40.97 ; 14.522,40.97 14.547,40.995 14.522,41.02 ; 14.522,41.02 14.672,41.02 ; 14.522,41.02 14.522,41.045 ; 14.522,41.045 14.647,41.045 ; 14.522,41.045 14.547,41.07 ; 14.522,41.095 14.647,41.095 ; 14.522,41.095 14.522,41.12 ; 14.522,41.095 14.547,41.07 ; 14.522,41.12 14.672,41.12 ; 14.522,41.12 14.547,41.145 14.522,41.17 ; 14.522,41.17 14.672,41.17 ; 14.522,41.17 14.522,41.195 ; 14.522,41.195 14.647,41.195 ; 14.522,41.195 14.547,41.22 ; 14.522,41.245 14.647,41.245 ; 14.522,41.245 14.522,41.27 ; 14.522,41.245 14.547,41.22 ; 14.522,41.27 14.672,41.27 ; 14.522,41.27 14.547,41.295 14.522,41.32 ; 14.522,41.32 14.672,41.32 ; 14.522,41.32 14.522,41.345 ; 14.522,41.345 14.647,41.345 ; 14.522,41.345 14.547,41.37 ; 14.522,41.395 14.647,41.395 ; 14.522,41.395 14.522,41.42 ; 14.522,41.395 14.547,41.37 ; 14.522,41.42 14.672,41.42 ; 14.522,41.42 14.547,41.445 14.522,41.47 ; 14.522,41.47 14.672,41.47 ; 14.522,41.47 14.522,41.495 ; 14.522,41.495 14.647,41.495 ; 14.522,41.495 14.547,41.52 ; 14.522,41.545 14.647,41.545 ; 14.522,41.545 14.522,41.57 ; 14.522,41.545 14.547,41.52 ; 14.522,41.57 14.672,41.57 ; 14.522,41.57 14.547,41.595 14.522,41.62 ; 14.522,41.62 14.672,41.62 ; 14.522,41.62 14.522,41.645 ; 14.522,41.645 14.647,41.645 ; 14.522,41.645 14.547,41.67 ; 14.522,41.695 14.647,41.695 ; 14.522,41.695 14.522,41.72 ; 14.522,41.695 14.547,41.67 ; 14.522,41.72 14.672,41.72 ; 14.522,41.72 14.547,41.745 14.522,41.77 ; 14.522,41.77 14.672,41.77 ; 14.522,41.77 14.522,41.795 ; 14.522,41.795 14.647,41.795 ; 14.522,41.795 14.547,41.82 ; 14.522,41.845 14.647,41.845 ; 14.522,41.845 14.522,41.87 ; 14.522,41.845 14.547,41.82 ; 14.522,41.87 14.672,41.87 ; 14.522,41.87 14.547,41.895 14.522,41.92 ; 14.522,41.92 14.672,41.92 ; 14.522,41.92 14.522,41.945 ; 14.522,41.945 14.647,41.945 ; 14.522,41.945 14.547,41.97 ; 14.522,41.995 14.647,41.995 ; 14.522,41.995 14.522,42.02 ; 14.522,41.995 14.547,41.97 ; 14.522,42.02 14.672,42.02 ; 14.522,42.02 14.547,42.045 14.522,42.07 ; 14.522,42.07 14.672,42.07 ; 14.522,42.07 14.522,42.095 ; 14.522,42.095 14.647,42.095 ; 14.522,42.095 14.547,42.12 ; 14.522,42.145 14.647,42.145 ; 14.522,42.145 14.522,42.17 ; 14.522,42.145 14.547,42.12 ; 14.522,42.17 14.672,42.17 ; 14.522,42.17 14.547,42.195 14.522,42.22 ; 14.522,42.22 14.672,42.22 ; 14.522,42.22 14.522,42.245 ; 14.522,42.245 14.647,42.245 ; 14.522,42.245 14.547,42.27 ; 14.522,42.295 14.647,42.295 ; 14.522,42.295 14.522,42.32 ; 14.522,42.295 14.547,42.27 ; 14.522,42.32 14.672,42.32 ; 14.522,42.32 14.547,42.345 14.522,42.37 ; 14.522,42.37 14.672,42.37 ; 14.522,42.37 14.522,42.395 ; 14.522,42.395 14.647,42.395 ; 14.522,42.395 14.547,42.42 ; 14.522,42.445 14.647,42.445 ; 14.522,42.445 14.522,42.47 ; 14.522,42.445 14.547,42.42 ; 14.522,42.47 14.672,42.47 ; 14.522,42.47 14.547,42.495 14.522,42.52 ; 14.522,42.52 14.672,42.52 ; 14.522,42.52 14.522,42.545 ; 14.522,42.545 14.647,42.545 ; 14.522,42.545 14.547,42.57 ; 14.522,42.595 14.647,42.595 ; 14.522,42.595 14.522,42.62 ; 14.522,42.595 14.547,42.57 ; 14.522,42.62 14.672,42.62 ; 14.522,42.62 14.547,42.645 14.522,42.67 ; 14.522,42.67 14.672,42.67 ; 14.522,42.67 14.522,42.695 ; 14.522,42.695 14.647,42.695 ; 14.522,42.695 14.547,42.72 ; 14.522,42.745 14.647,42.745 ; 14.522,42.745 14.522,42.77 ; 14.522,42.745 14.547,42.72 ; 14.522,42.77 14.672,42.77 ; 14.522,42.77 14.547,42.795 14.522,42.82 ; 14.522,42.82 14.672,42.82 ; 14.522,42.82 14.522,42.845 ; 14.522,42.845 14.647,42.845 ; 14.522,42.845 14.547,42.87 ; 14.522,42.895 14.647,42.895 ; 14.522,42.895 14.522,42.92 ; 14.522,42.895 14.547,42.87 ; 14.522,42.92 14.672,42.92 ; 14.522,42.92 14.547,42.945 14.522,42.97 ; 14.522,42.97 14.672,42.97 ; 14.522,42.97 14.522,42.995 ; 14.522,42.995 14.647,42.995 ; 14.522,42.995 14.547,43.02 ; 14.522,43.045 14.647,43.045 ; 14.522,43.045 14.522,43.07 ; 14.522,43.045 14.547,43.02 ; 14.522,43.07 14.672,43.07 ; 14.522,43.07 14.547,43.095 14.522,43.12 ; 14.522,43.12 14.672,43.12 ; 14.522,43.12 14.522,43.145 ; 14.522,43.145 14.647,43.145 ; 14.522,43.145 14.547,43.17 ; 14.522,43.195 14.647,43.195 ; 14.522,43.195 14.522,43.22 ; 14.522,43.195 14.547,43.17 ; 14.522,43.22 14.672,43.22 ; 14.522,43.22 14.547,43.245 14.522,43.27 ; 14.522,43.27 14.672,43.27 ; 14.522,43.27 14.522,43.295 ; 14.522,43.295 14.647,43.295 ; 14.522,43.295 14.547,43.32 ; 14.522,43.345 14.647,43.345 ; 14.522,43.345 14.522,43.37 ; 14.522,43.345 14.547,43.32 ; 14.522,43.37 14.672,43.37 ; 14.522,43.37 14.547,43.395 14.522,43.42 ; 14.522,43.42 14.672,43.42 ; 14.522,43.42 14.522,43.445 ; 14.522,43.445 14.647,43.445 ; 14.522,43.445 14.547,43.47 ; 14.522,43.495 14.647,43.495 ; 14.522,43.495 14.522,43.52 ; 14.522,43.495 14.547,43.47 ; 14.522,43.52 14.672,43.52 ; 14.522,43.52 14.547,43.545 14.522,43.57 ; 14.522,43.57 14.672,43.57 ; 14.522,43.57 14.522,43.595 ; 14.522,43.595 14.647,43.595 ; 14.522,43.595 14.547,43.62 ; 14.522,43.645 14.647,43.645 ; 14.522,43.645 14.522,43.67 ; 14.522,43.645 14.547,43.62 ; 14.522,43.67 14.672,43.67 ; 14.522,43.67 14.547,43.695 14.522,43.72 ; 14.522,43.72 14.672,43.72 ; 14.522,43.72 14.522,43.745 ; 14.522,43.745 14.647,43.745 ; 14.522,43.745 14.547,43.77 ; 14.522,43.795 14.647,43.795 ; 14.522,43.795 14.522,43.82 ; 14.522,43.795 14.547,43.77 ; 14.522,43.82 14.672,43.82 ; 14.522,43.82 14.547,43.845 14.522,43.87 ; 14.522,43.87 14.672,43.87 ; 14.522,43.87 14.522,43.895 ; 14.522,43.895 14.647,43.895 ; 14.522,43.895 14.547,43.92 ; 14.522,43.945 14.647,43.945 ; 14.522,43.945 14.522,43.97 ; 14.522,43.945 14.547,43.92 ; 14.522,43.97 14.672,43.97 ; 14.522,43.97 14.547,43.995 14.522,44.02 ; 14.522,44.02 14.672,44.02 ; 14.522,44.02 14.522,44.045 ; 14.522,44.045 14.647,44.045 ; 14.522,44.045 14.547,44.07 ; 14.522,44.095 14.647,44.095 ; 14.522,44.095 14.522,44.12 ; 14.522,44.095 14.547,44.07 ; 14.522,44.12 14.672,44.12 ; 14.522,44.12 14.547,44.145 14.522,44.17 ; 14.522,44.17 14.672,44.17 ; 14.522,44.17 14.522,44.195 ; 14.522,44.195 14.647,44.195 ; 14.522,44.195 14.547,44.22 ; 14.522,44.245 14.647,44.245 ; 14.522,44.245 14.522,44.27 ; 14.522,44.245 14.547,44.22 ; 14.522,44.27 14.672,44.27 ; 14.522,44.27 14.547,44.295 14.522,44.32 ; 14.522,44.32 14.672,44.32 ; 14.522,44.32 14.522,44.345 ; 14.522,44.345 14.647,44.345 ; 14.522,44.345 14.547,44.37 ; 14.522,44.395 14.647,44.395 ; 14.522,44.395 14.522,44.42 ; 14.522,44.395 14.547,44.37 ; 14.522,44.42 14.672,44.42 ; 14.522,44.42 14.547,44.445 14.522,44.47 ; 14.522,44.47 14.672,44.47 ; 14.522,44.47 14.522,44.495 ; 14.522,44.495 14.647,44.495 ; 14.522,44.495 14.547,44.52 ; 14.522,44.545 14.647,44.545 ; 14.522,44.545 14.522,44.57 ; 14.522,44.545 14.547,44.52 ; 14.522,44.57 14.672,44.57 ; 14.522,44.57 14.547,44.595 14.522,44.62 ; 14.522,44.62 14.672,44.62 ; 14.522,44.62 14.522,44.645 ; 14.522,44.645 14.647,44.645 ; 14.522,44.645 14.547,44.67 ; 14.522,44.695 14.647,44.695 ; 14.522,44.695 14.522,44.72 ; 14.522,44.695 14.547,44.67 ; 14.522,44.72 14.672,44.72 ; 14.522,44.72 14.547,44.745 14.522,44.77 ; 14.522,44.77 14.672,44.77 ; 14.522,44.77 14.522,44.795 ; 14.522,44.795 14.647,44.795 ; 14.522,44.795 14.547,44.82 ; 14.522,44.845 14.647,44.845 ; 14.522,44.845 14.522,44.87 ; 14.522,44.845 14.547,44.82 ; 14.522,44.87 14.672,44.87 ; 14.522,44.87 14.547,44.895 14.522,44.92 ; 14.522,44.92 14.672,44.92 ; 14.522,44.92 14.522,44.945 ; 14.522,44.945 14.647,44.945 ; 14.522,44.945 14.547,44.97 ; 14.522,44.995 14.647,44.995 ; 14.522,44.995 14.522,45.02 ; 14.522,44.995 14.547,44.97 ; 14.522,45.02 14.672,45.02 ; 14.522,45.02 14.547,45.045 14.522,45.07 ; 14.522,45.07 14.672,45.07 ; 14.522,45.07 14.522,45.095 ; 14.522,45.095 14.647,45.095 ; 14.522,45.095 14.547,45.12 ; 14.522,45.145 14.647,45.145 ; 14.522,45.145 14.547,45.12 ; 14.547,21.27 14.672,21.27 ; 14.547,21.42 14.672,21.42 ; 14.547,21.57 14.672,21.57 ; 14.547,21.72 14.672,21.72 ; 14.547,21.87 14.672,21.87 ; 14.547,22.02 14.672,22.02 ; 14.547,22.17 14.672,22.17 ; 14.547,22.32 14.672,22.32 ; 14.547,22.47 14.672,22.47 ; 14.547,22.62 14.672,22.62 ; 14.547,22.77 14.672,22.77 ; 14.547,22.92 14.672,22.92 ; 14.547,23.07 14.672,23.07 ; 14.547,23.22 14.672,23.22 ; 14.547,23.37 14.672,23.37 ; 14.547,23.52 14.672,23.52 ; 14.547,23.67 14.672,23.67 ; 14.547,23.82 14.672,23.82 ; 14.547,23.97 14.672,23.97 ; 14.547,24.12 14.672,24.12 ; 14.547,24.27 14.672,24.27 ; 14.547,24.42 14.672,24.42 ; 14.547,24.57 14.672,24.57 ; 14.547,24.72 14.672,24.72 ; 14.547,24.87 14.672,24.87 ; 14.547,25.02 14.672,25.02 ; 14.547,25.17 14.672,25.17 ; 14.547,25.32 14.672,25.32 ; 14.547,25.47 14.672,25.47 ; 14.547,25.62 14.672,25.62 ; 14.547,25.77 14.672,25.77 ; 14.547,25.92 14.672,25.92 ; 14.547,26.07 14.672,26.07 ; 14.547,26.22 14.672,26.22 ; 14.547,26.37 14.672,26.37 ; 14.547,26.52 14.672,26.52 ; 14.547,26.67 14.672,26.67 ; 14.547,26.82 14.672,26.82 ; 14.547,26.97 14.672,26.97 ; 14.547,27.12 14.672,27.12 ; 14.547,27.27 14.672,27.27 ; 14.547,27.42 14.672,27.42 ; 14.547,27.57 14.672,27.57 ; 14.547,27.72 14.672,27.72 ; 14.547,27.87 14.672,27.87 ; 14.547,28.02 14.672,28.02 ; 14.547,28.17 14.672,28.17 ; 14.547,28.32 14.672,28.32 ; 14.547,28.47 14.672,28.47 ; 14.547,28.62 14.672,28.62 ; 14.547,28.77 14.672,28.77 ; 14.547,28.92 14.672,28.92 ; 14.547,29.07 14.672,29.07 ; 14.547,29.22 14.672,29.22 ; 14.547,29.37 14.672,29.37 ; 14.547,29.52 14.672,29.52 ; 14.547,29.67 14.672,29.67 ; 14.547,29.82 14.672,29.82 ; 14.547,29.97 14.672,29.97 ; 14.547,30.12 14.672,30.12 ; 14.547,30.27 14.672,30.27 ; 14.547,30.42 14.672,30.42 ; 14.547,30.57 14.672,30.57 ; 14.547,30.72 14.672,30.72 ; 14.547,30.87 14.672,30.87 ; 14.547,31.02 14.672,31.02 ; 14.547,31.17 14.672,31.17 ; 14.547,31.32 14.672,31.32 ; 14.547,31.47 14.672,31.47 ; 14.547,31.62 14.672,31.62 ; 14.547,31.77 14.672,31.77 ; 14.547,31.92 14.672,31.92 ; 14.547,32.07 14.672,32.07 ; 14.547,32.22 14.672,32.22 ; 14.547,32.37 14.672,32.37 ; 14.547,32.52 14.672,32.52 ; 14.547,32.67 14.672,32.67 ; 14.547,32.82 14.672,32.82 ; 14.547,32.97 14.672,32.97 ; 14.547,33.12 14.672,33.12 ; 14.547,33.27 14.672,33.27 ; 14.547,33.42 14.672,33.42 ; 14.547,33.57 14.672,33.57 ; 14.547,33.72 14.672,33.72 ; 14.547,33.87 14.672,33.87 ; 14.547,34.02 14.672,34.02 ; 14.547,34.17 14.672,34.17 ; 14.547,34.32 14.672,34.32 ; 14.547,34.47 14.672,34.47 ; 14.547,34.62 14.672,34.62 ; 14.547,34.77 14.672,34.77 ; 14.547,34.92 14.672,34.92 ; 14.547,35.07 14.672,35.07 ; 14.547,35.22 14.672,35.22 ; 14.547,35.37 14.672,35.37 ; 14.547,35.52 14.672,35.52 ; 14.547,35.67 14.672,35.67 ; 14.547,35.82 14.672,35.82 ; 14.547,35.97 14.672,35.97 ; 14.547,36.12 14.672,36.12 ; 14.547,36.27 14.672,36.27 ; 14.547,36.42 14.672,36.42 ; 14.547,36.57 14.672,36.57 ; 14.547,36.72 14.672,36.72 ; 14.547,36.87 14.672,36.87 ; 14.547,37.02 14.672,37.02 ; 14.547,37.17 14.672,37.17 ; 14.547,37.32 14.672,37.32 ; 14.547,37.47 14.672,37.47 ; 14.547,37.62 14.672,37.62 ; 14.547,37.77 14.672,37.77 ; 14.547,37.92 14.672,37.92 ; 14.547,38.07 14.672,38.07 ; 14.547,38.22 14.672,38.22 ; 14.547,38.37 14.672,38.37 ; 14.547,38.52 14.672,38.52 ; 14.547,38.67 14.672,38.67 ; 14.547,38.82 14.672,38.82 ; 14.547,38.97 14.672,38.97 ; 14.547,39.12 14.672,39.12 ; 14.547,39.27 14.672,39.27 ; 14.547,39.42 14.672,39.42 ; 14.547,39.57 14.672,39.57 ; 14.547,39.72 14.672,39.72 ; 14.547,39.87 14.672,39.87 ; 14.547,40.02 14.672,40.02 ; 14.547,40.17 14.672,40.17 ; 14.547,40.32 14.672,40.32 ; 14.547,40.47 14.672,40.47 ; 14.547,40.62 14.672,40.62 ; 14.547,40.77 14.672,40.77 ; 14.547,40.92 14.672,40.92 ; 14.547,41.07 14.672,41.07 ; 14.547,41.22 14.672,41.22 ; 14.547,41.37 14.672,41.37 ; 14.547,41.52 14.672,41.52 ; 14.547,41.67 14.672,41.67 ; 14.547,41.82 14.672,41.82 ; 14.547,41.97 14.672,41.97 ; 14.547,42.12 14.672,42.12 ; 14.547,42.27 14.672,42.27 ; 14.547,42.42 14.672,42.42 ; 14.547,42.57 14.672,42.57 ; 14.547,42.72 14.672,42.72 ; 14.547,42.87 14.672,42.87 ; 14.547,43.02 14.672,43.02 ; 14.547,43.17 14.672,43.17 ; 14.547,43.32 14.672,43.32 ; 14.547,43.47 14.672,43.47 ; 14.547,43.62 14.672,43.62 ; 14.547,43.77 14.672,43.77 ; 14.547,43.92 14.672,43.92 ; 14.547,44.07 14.672,44.07 ; 14.547,44.22 14.672,44.22 ; 14.547,44.37 14.672,44.37 ; 14.547,44.52 14.672,44.52 ; 14.547,44.67 14.672,44.67 ; 14.547,44.82 14.672,44.82 ; 14.547,44.97 14.672,44.97 ; 14.547,45.12 14.672,45.12 ; 14.597,21.12 14.622,21.145 ; 14.647,21.245 14.647,45.145 ; 14.647,21.245 14.672,21.27 ; 14.647,21.295 14.672,21.32 ; 14.647,21.295 14.672,21.27 ; 14.647,21.395 14.672,21.42 ; 14.647,21.395 14.672,21.37 ; 14.647,21.445 14.672,21.47 ; 14.647,21.445 14.672,21.42 ; 14.647,21.545 14.672,21.57 ; 14.647,21.545 14.672,21.52 ; 14.647,21.595 14.672,21.62 ; 14.647,21.595 14.672,21.57 ; 14.647,21.695 14.672,21.72 ; 14.647,21.695 14.672,21.67 ; 14.647,21.745 14.672,21.77 ; 14.647,21.745 14.672,21.72 ; 14.647,21.845 14.672,21.87 ; 14.647,21.845 14.672,21.82 ; 14.647,21.895 14.672,21.92 ; 14.647,21.895 14.672,21.87 ; 14.647,21.995 14.672,22.02 ; 14.647,21.995 14.672,21.97 ; 14.647,22.045 14.672,22.07 ; 14.647,22.045 14.672,22.02 ; 14.647,22.145 14.672,22.17 ; 14.647,22.145 14.672,22.12 ; 14.647,22.195 14.672,22.22 ; 14.647,22.195 14.672,22.17 ; 14.647,22.295 14.672,22.32 ; 14.647,22.295 14.672,22.27 ; 14.647,22.345 14.672,22.37 ; 14.647,22.345 14.672,22.32 ; 14.647,22.445 14.672,22.47 ; 14.647,22.445 14.672,22.42 ; 14.647,22.495 14.672,22.52 ; 14.647,22.495 14.672,22.47 ; 14.647,22.595 14.672,22.62